# EAGLE board board comp 1 (EAGLE 6.3), part 1 of 2
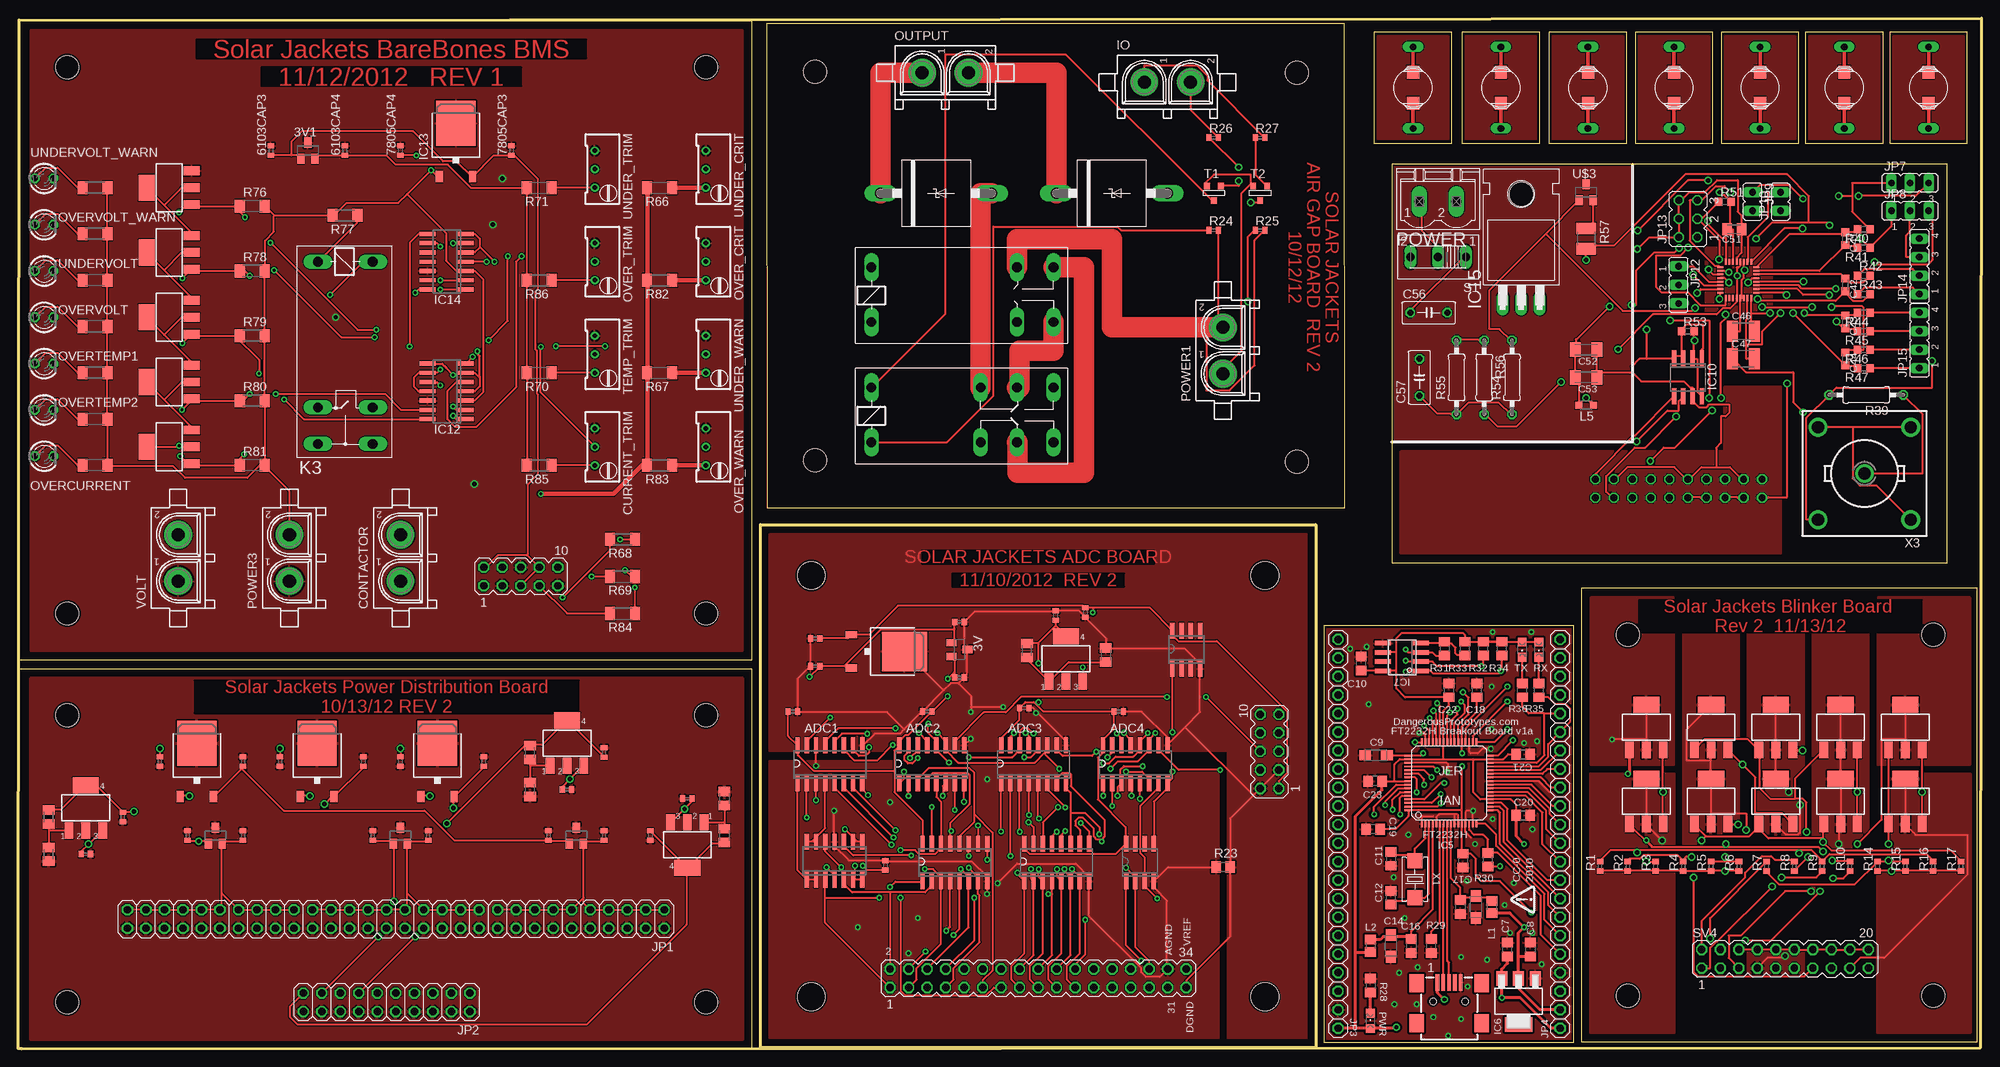
[diagram p0: board, top side]
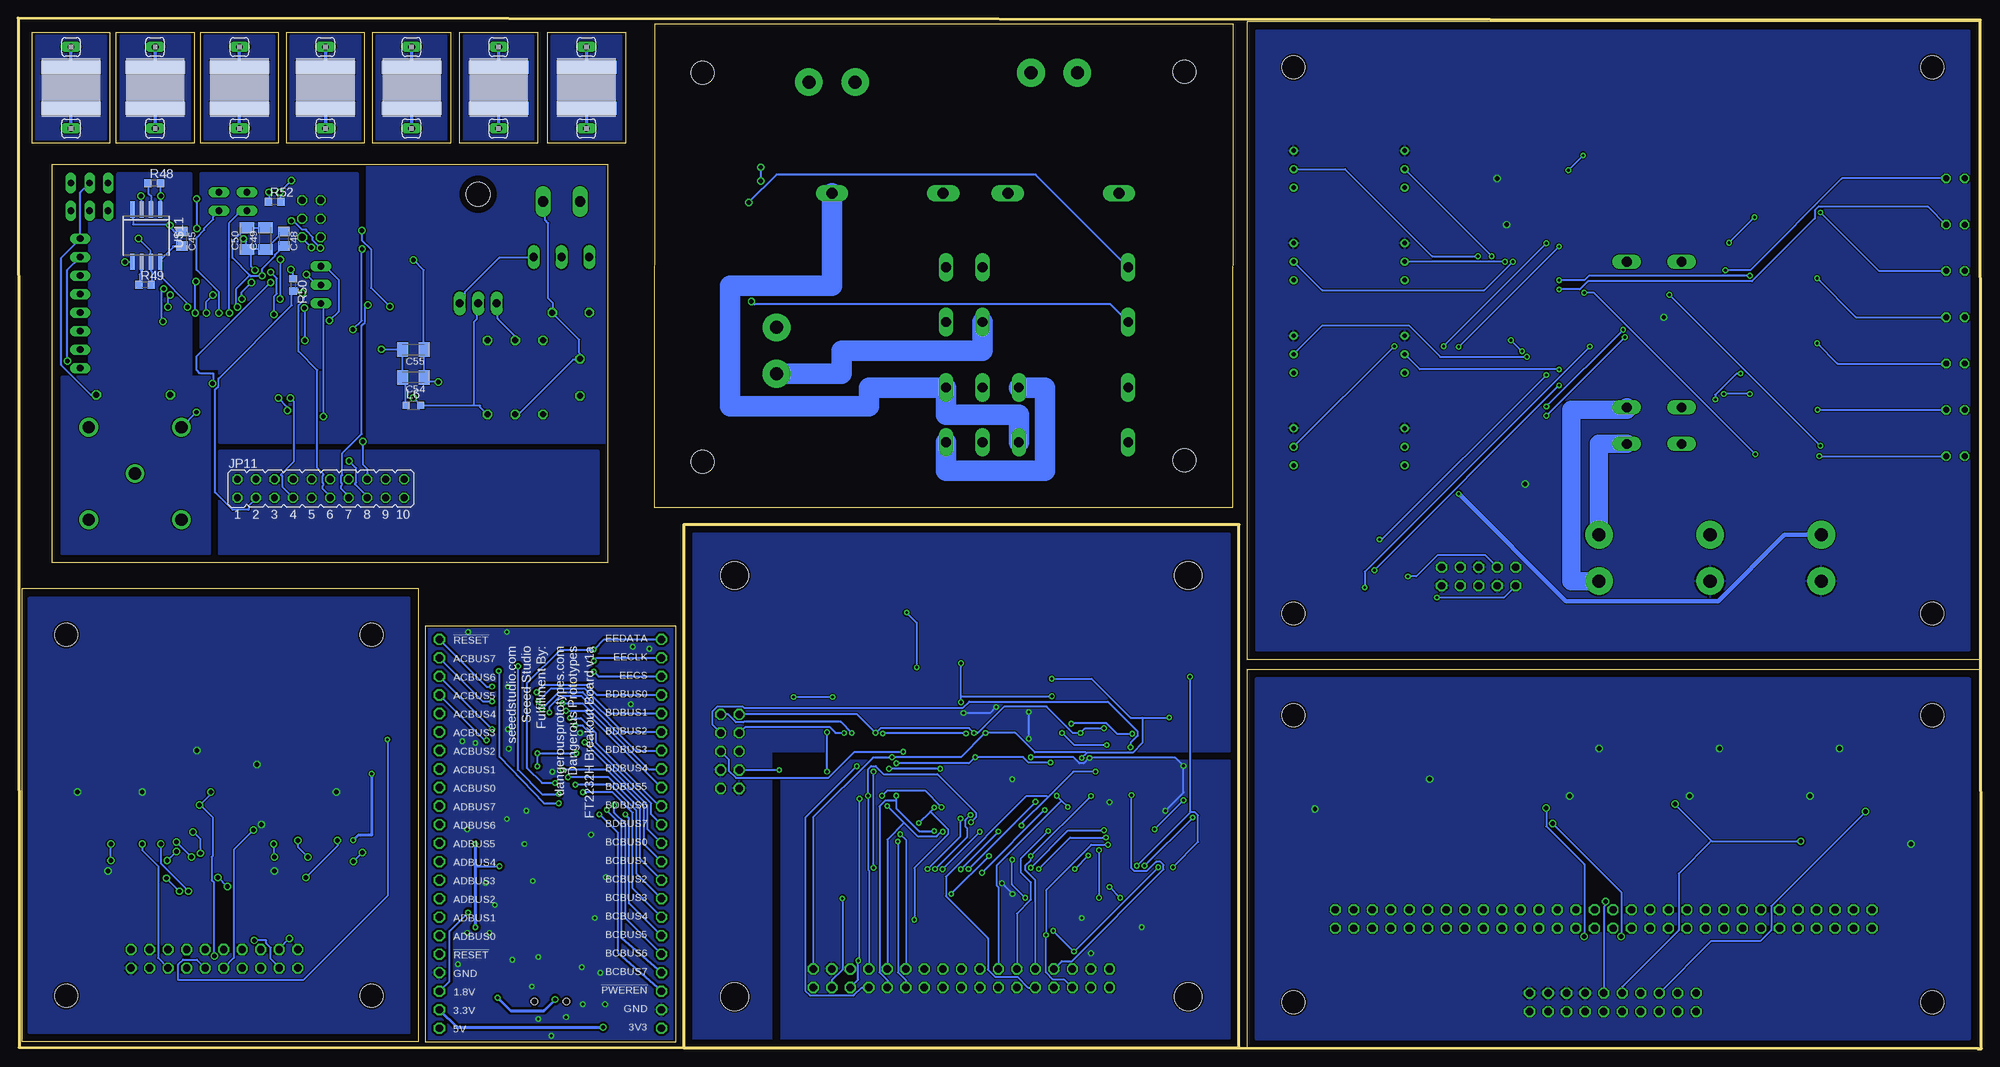
[diagram p1: board, bottom side, seen from below]

Size 269.37 x 141.35 mm. Coordinates in mm from the lower left corner, seen from the top.
Outline: 0.38,0 0.08,0 0.08,52.05 100.71,52.05 100.71,0 0.51,0
Outline: 0.51,0 0.38,0
Outline: 0.38,0 0,0 0.13,141.1 269.37,141.35 269.24,0.13 0.51,0
Outline: 100.71,53.34 100.71,140.95 0.08,140.95 0.08,53.34 100.71,53.34
Outline: 214.5,63.12 214.5,0.91 268.78,0.91 268.78,63.12 214.5,63.12
Outline: 188.47,121.28 188.47,66.67 264.67,66.67 264.67,121.28 188.47,121.28
Outline: 101.85,0.13 101.85,71.88 178.05,71.88 178.05,0.13 101.85,0.13
Outline: 102.74,74.17 182.06,74.17 182.01,140.59 102.69,140.59 102.74,74.17
Outline: 196.72,124.21 196.72,139.45 186.06,139.45 186.06,124.21 196.72,124.21
Outline: 208.79,124.21 208.79,139.45 198.12,139.45 198.12,124.21 208.79,124.21
Outline: 220.73,124.21 220.73,139.45 210.06,139.45 210.06,124.21 220.73,124.21
Outline: 232.54,124.21 232.54,139.45 221.87,139.45 221.87,124.21 232.54,124.21
Outline: 244.35,124.21 244.35,139.45 233.68,139.45 233.68,124.21 244.35,124.21
Outline: 255.91,124.21 255.91,139.45 245.24,139.45 245.24,124.21 255.91,124.21
Outline: 267.46,124.21 267.46,139.45 256.79,139.45 256.79,124.21 267.46,124.21
Outline: 213.49,0.89 213.49,58.04 179.2,58.04 179.2,0.89 213.49,0.89
Copper layers (1*16): Top 0.035mm / dielectric 1.5mm / Bottom 0.035mm
Design rules "default *": minimum track width 8mil, minimum drill 15mil, track to track 6mil, track to pad 6mil, pad to pad 6mil, via to via 6mil, smd to smd 6mil, copper to edge 10mil, drill to drill 8mil, minimum pad ring 10mil, minimum via ring 8mil, stop-mask expansion 4mil, vias tented up to drill 0mil, thermal gap 10mil
Holes 3.17 mm at 94.36,59.69 6.73,59.69 94.36,134.62 6.73,134.62 220.85,56.77 220.85,7.24 262.76,56.77 262.76,7.24 94.36,6.35 6.73,6.35 6.73,45.72 94.36,45.72 109.32,80.7 175.48,133.86 175.48,80.52 109.32,134.04
Holes 3.81 mm at 171.07,64.9 108.84,64.9 171.07,7.11 108.84,7.11

## Footprints (pad centres in the part's own frame; a part is rotated, then mirrored left to right if it is on the bottom)
SOT23 = smd 1 x 1.4: 1 -0.95,-1.1; 2 0.95,-1.1; 3 0,1.1
TO252 = smd 1 x 1.6: 1 -2.28,-4.8; 2 2.28,-4.8 | smd 5.4 x 6.2: 3 0,2.5
C0402 = smd 0.7 x 0.9: 1 -0.65,0; 2 0.65,0
SO16 = smd 0.6 x 2.2: 1 -4.445,-2.6; 2 -3.175,-2.6; 3 -1.905,-2.6; 4 -0.635,-2.6; 5 0.635,-2.6; 6 1.905,-2.6; 7 3.175,-2.6; 8 4.445,-2.6; 9 4.445,2.6; 10 3.175,2.6; 11 1.905,2.6; 12 0.635,2.6; 13 -0.635,2.6; 14 -1.905,2.6; 15 -3.175,2.6; 16 -4.445,2.6
SOT223 = smd 1.219 x 2.235: 1 -2.311,-3.099; 2 0,-3.099; 3 2.311,-3.099 | smd 3.6 x 2.2: 4 0,3.099
C805 = smd 1.3 x 1.5: 1 -0.95,0; 2 0.95,0
SMC_A = smd 1.6 x 1.4: + -1.5,0; - 1.5,0
C0603K = smd 1.05 x 1.08: 1 -0.875,0; 2 0.875,0
C0805K = smd 1.3 x 1.6: 1 -1,0; 2 1,0
C1210K = smd 1.5 x 2.9: 1 -1.5,0; 2 1.5,0
C1206K = smd 1.5 x 2: 1 -1.5,0; 2 1.5,0
C050-030X075 = drill 0.813 octagon: 1 -2.54,0; 2 2.54,0
CONN_USB_MINI-B = smd 2 x 2.5: BODY@1 -4.45,2.5; BODY@2 4.45,2.5; BODY@3 4.45,-3; BODY@4 -4.45,-3 | smd 0.5 x 2.3: D+ 0,2.6; D- -0.8,2.6; GND 1.6,2.6; ID 0.8,2.6; VUSB -1.6,2.6 | hole 0.9: -2.2,0; 2.2,0
350428-1 = drill 1.8 pad 3.81: 1 -3.175,0; 2 3.175,0
RTRIM64W = drill 0.61: 1 1.27,-2.54; 2 1.27,0; 3 1.27,2.54
P6T15 = drill 1.499 long: A 7.62,0; C -7.62,0
LQFP64 = smd 1 x 0.27: 1 -5.6,3.75; 2 -5.6,3.25; 3 -5.6,2.75; 4 -5.6,2.25; 5 -5.6,1.75; 6 -5.6,1.25; 7 -5.6,0.75; 8 -5.6,0.25; 9 -5.6,-0.25; 10 -5.6,-0.75; 11 -5.6,-1.25; 12 -5.6,-1.75; 13 -5.6,-2.25; 14 -5.6,-2.75; 15 -5.6,-3.25; 16 -5.6,-3.75; 33 5.6,-3.75; 34 5.6,-3.25; 35 5.6,-2.75; 36 5.6,-2.25; 37 5.6,-1.75; 38 5.6,-1.25; 39 5.6,-0.75; 40 5.6,-0.25; 41 5.6,0.25; 42 5.6,0.75; 43 5.6,1.25; 44 5.6,1.75; 45 5.6,2.25; 46 5.6,2.75; 47 5.6,3.25; 48 5.6,3.75 | smd 0.27 x 1: 17 -3.75,-5.6; 18 -3.25,-5.6; 19 -2.75,-5.6; 20 -2.25,-5.6; 21 -1.75,-5.6; 22 -1.25,-5.6; 23 -0.75,-5.6; 24 -0.25,-5.6; 25 0.25,-5.6; 26 0.75,-5.6; 27 1.25,-5.6; 28 1.75,-5.6; 29 2.25,-5.6; 30 2.75,-5.6; 31 3.25,-5.6; 32 3.75,-5.6; 49 3.75,5.6; 50 3.25,5.6; 51 2.75,5.6; 52 2.25,5.6; 53 1.75,5.6; 54 1.25,5.6; 55 0.75,5.6; 56 0.25,5.6; 57 -0.25,5.6; 58 -0.75,5.6; 59 -1.25,5.6; 60 -1.75,5.6; 61 -2.25,5.6; 62 -2.75,5.6; 63 -3.25,5.6; 64 -3.75,5.6
SOT223' = smd 1.5 x 2: 1 -2.3,-3.15; 2 0,-3.15; 3 2.3,-3.15 | smd 3.8 x 2: 4 0,3.15
SOIC8 = smd 0.6 x 2.2: 1 -1.905,-2.6; 2 -0.635,-2.6; 3 0.635,-2.6; 4 1.905,-2.6; 5 1.905,2.6; 6 0.635,2.6; 7 -0.635,2.6; 8 -1.905,2.6
SO-08 = smd 0.6 x 2.2: 1 -1.905,-2.6; 2 -0.635,-2.6; 3 0.635,-2.6; 4 1.905,-2.6; 5 1.905,2.6; 6 0.635,2.6; 7 -0.635,2.6; 8 -1.905,2.6
SO14 = smd 0.6 x 2.2: 1 -3.81,-2.6; 2 -2.54,-2.6; 3 -1.27,-2.6; 4 0,-2.6; 5 1.27,-2.6; 6 2.54,-2.6; 7 3.81,-2.6; 8 3.81,2.6; 9 2.54,2.6; 10 1.27,2.6; 11 0,2.6; 12 -1.27,2.6; 13 -2.54,2.6; 14 -3.81,2.6
TO220H = drill 1.118 long: 1 -2.54,-10.16; 2 0,-10.16; 3 2.54,-10.16 | hole 3.302: 0,4.826
2X30 = drill 1.016 octagon: 1 -38.1,-1.27; 2 -38.1,1.27; 3 -35.56,-1.27; 4 -35.56,1.27; 5 -33.02,-1.27; 6 -33.02,1.27; 7 -30.48,-1.27; 8 -30.48,1.27; 9 -27.94,-1.27; 10 -27.94,1.27; 11 -25.4,-1.27; 12 -25.4,1.27; 13 -22.86,-1.27; 14 -22.86,1.27; 15 -20.32,-1.27; 16 -20.32,1.27; 17 -17.78,-1.27; 18 -17.78,1.27; 19 -15.24,-1.27; 20 -15.24,1.27; 21 -12.7,-1.27; 22 -12.7,1.27; 23 -10.16,-1.27; 24 -10.16,1.27; 25 -7.62,-1.27; 26 -7.62,1.27; 27 -5.08,-1.27; 28 -5.08,1.27; 29 -2.54,-1.27; 30 -2.54,1.27; 31 0,-1.27; 32 0,1.27; 33 2.54,-1.27; 34 2.54,1.27; 35 5.08,-1.27; 36 5.08,1.27; 37 7.62,-1.27; 38 7.62,1.27; 39 10.16,-1.27; 40 10.16,1.27; 41 12.7,-1.27; 42 12.7,1.27; 43 15.24,-1.27; 44 15.24,1.27; 45 17.78,-1.27; 46 17.78,1.27; 47 20.32,-1.27; 48 20.32,1.27; 49 22.86,-1.27; 50 22.86,1.27; 51 25.4,-1.27; 52 25.4,1.27; 53 27.94,-1.27; 54 27.94,1.27; 55 30.48,-1.27; 56 30.48,1.27; 57 33.02,-1.27; 58 33.02,1.27; 59 35.56,-1.27; 60 35.56,1.27
2X10 = drill 1.016 octagon: 1 -11.43,-1.27; 2 -11.43,1.27; 3 -8.89,-1.27; 4 -8.89,1.27; 5 -6.35,-1.27; 6 -6.35,1.27; 7 -3.81,-1.27; 8 -3.81,1.27; 9 -1.27,-1.27; 10 -1.27,1.27; 11 1.27,-1.27; 12 1.27,1.27; 13 3.81,-1.27; 14 3.81,1.27; 15 6.35,-1.27; 16 6.35,1.27; 17 8.89,-1.27; 18 8.89,1.27; 19 11.43,-1.27; 20 11.43,1.27
1X22 = drill 1.016 octagon: 1 -26.67,0; 2 -24.13,0; 3 -21.59,0; 4 -19.05,0; 5 -16.51,0; 6 -13.97,0; 7 -11.43,0; 8 -8.89,0; 9 -6.35,0; 10 -3.81,0; 11 -1.27,0; 12 1.27,0; 13 3.81,0; 14 6.35,0; 15 8.89,0; 16 11.43,0; 17 13.97,0; 18 16.51,0; 19 19.05,0; 20 21.59,0; 21 24.13,0; 22 26.67,0
JP2 = drill 0.914 long: 1 -2.54,0; 2 0,0; 3 2.54,0
JP1 = drill 0.914 long: 1 0,-1.27; 2 0,1.27
JP10Q = drill 0.914 octagon: 1 -11.43,-1.27; 2 -11.43,1.27; 3 -8.89,-1.27; 4 -8.89,1.27; 5 -6.35,-1.27; 6 -6.35,1.27; 7 -3.81,-1.27; 8 -3.81,1.27; 9 -1.27,-1.27; 10 -1.27,1.27; 11 1.27,-1.27; 12 1.27,1.27; 13 3.81,-1.27; 14 3.81,1.27; 15 6.35,-1.27; 16 6.35,1.27; 17 8.89,-1.27; 18 8.89,1.27; 19 11.43,-1.27; 20 11.43,1.27
JP3Q = drill 0.914 octagon: 1 -2.54,-1.27; 2 -2.54,1.27; 3 0,-1.27; 4 0,1.27; 5 2.54,-1.27; 6 2.54,1.27
JP4 = drill 0.914 long: 1 -3.81,0; 2 -1.27,0; 3 1.27,0; 4 3.81,0
G2R2 = drill 1.321 long: 1 -2.54,-3.683; 2 -2.54,3.81; O1 12.471,3.81; O2 12.471,-3.683; P1 17.45,3.81; P2 17.45,-3.683; S1 22.454,3.81; S2 22.454,-3.683
G2R2A = drill 1.321 long: 1 -2.54,-3.683; 2 -2.54,3.81; P1 17.45,3.81; P2 17.45,-3.683; S1 22.454,3.81; S2 22.454,-3.683
G2REA = drill 1.321 long: 1 -2.54,-3.683; 2 -2.54,3.81; P 17.45,-3.683; P@ 17.45,3.81; S 22.454,-3.683; S@ 22.454,3.81
FB805 = smd 1.3 x 1.5: 1 -0.85,0; 2 0.85,0
L2012C = smd 1 x 1: 1 -1,0; 2 1,0
LQH55PN220MR0L = smd 1.8 x 1.7: P$1 -2.135,0; P$2 2.135,0
NRS8040T0R9NJGJ = smd 8.2 x 1.8: P$1 0,2.8; P$2 0,-2.8
LED3MM = drill 0.813 octagon: A -1.27,0; K 1.27,0
MSTBV2 = drill 1.397 long: 1 -2.54,0; 2 2.54,0
LED-805 = smd 1.2 x 1.2: A 0,-1.05; C 0,1.05
R0402 = smd 0.7 x 0.9: 1 -0.65,0; 2 0.65,0
M0805 = smd 1.3 x 1.6: 1 -0.95,0; 2 0.95,0
R805 = smd 1.3 x 1.5: 1 -0.95,0; 2 0.95,0
0207/10 = drill 0.813 octagon: 1 -5.08,0; 2 5.08,0
R0603 = smd 1 x 1.1: 1 -0.85,0; 2 0.85,0
R3225 = smd 1.6 x 2.7: 1 -1.4,0; 2 1.4,0
M1406 = smd 1.4 x 1.8: 1 -1.7,0; 2 1.7,0
255SB = drill 1.118 long: 1 -3.81,0; 2 0,0; 3 3.81,0
MA17-2 = drill 1.016 octagon: 1 -20.32,-1.27; 2 -20.32,1.27; 3 -17.78,-1.27; 4 -17.78,1.27; 5 -15.24,-1.27; 6 -15.24,1.27; 7 -12.7,-1.27; 8 -12.7,1.27; 9 -10.16,-1.27; 10 -10.16,1.27; 11 -7.62,-1.27; 12 -7.62,1.27; 13 -5.08,-1.27; 14 -5.08,1.27; 15 -2.54,-1.27; 16 -2.54,1.27; 17 0,-1.27; 18 0,1.27; 19 2.54,-1.27; 20 2.54,1.27; 21 5.08,-1.27; 22 5.08,1.27; 23 7.62,-1.27; 24 7.62,1.27; 25 10.16,-1.27; 26 10.16,1.27; 27 12.7,-1.27; 28 12.7,1.27; 29 15.24,-1.27; 30 15.24,1.27; 31 17.78,-1.27; 32 17.78,1.27; 33 20.32,-1.27; 34 20.32,1.27
MA05-2 = drill 1.016 octagon: 1 -5.08,-1.27; 2 -5.08,1.27; 3 -2.54,-1.27; 4 -2.54,1.27; 5 0,-1.27; 6 0,1.27; 7 2.54,-1.27; 8 2.54,1.27; 9 5.08,-1.27; 10 5.08,1.27
MA10-2 = drill 1.016 octagon: 1 -11.43,-1.27; 2 -11.43,1.27; 3 -8.89,-1.27; 4 -8.89,1.27; 5 -6.35,-1.27; 6 -6.35,1.27; 7 -3.81,-1.27; 8 -3.81,1.27; 9 -1.27,-1.27; 10 -1.27,1.27; 11 1.27,-1.27; 12 1.27,1.27; 13 3.81,-1.27; 14 3.81,1.27; 15 6.35,-1.27; 16 6.35,1.27; 17 8.89,-1.27; 18 8.89,1.27; 19 11.43,-1.27; 20 11.43,1.27
SOT-23 = smd 0.787 x 0.889: 1 0.025,-1.016; 2 -0.94,1.016; 3 0.991,1.016
ADS8363 = smd 0.28 x 0.85: P$1_ 0.725,0.725; P$2_ 1.225,0.725; P$3_ 1.725,0.725; P$4_ 2.225,0.725; P$5_ 2.725,0.725; P$6_ 3.225,0.725; P$7_ 3.725,0.725; P$8_ 4.225,0.725; P$17_ 4.225,-4.225; P$18_ 3.725,-4.225; P$19_ 3.225,-4.225; P$20_ 2.725,-4.225; P$21_ 2.225,-4.225; P$22_ 1.725,-4.225; P$23_ 1.225,-4.225; P$24_ 0.725,-4.225 | smd 0.85 x 0.28: P$9_ 4.95,0; P$10_ 4.95,-0.5; P$11_ 4.95,-1; P$12_ 4.95,-1.5; P$13_ 4.95,-2; P$14_ 4.95,-2.5; P$15_ 4.95,-3; P$16_ 4.95,-3.5; P$25_ 0,-3.5; P$26_ 0,-3; P$27_ 0,-2.5; P$28_ 0,-2; P$29_ 0,-1.5; P$30_ 0,-1; P$31_ 0,-0.5; P$32_ 0,0
SINGLE_HEADER = drill 0.914 long: P$1 0,0
SOP-08 = smd 0.6 x 2.2: 1 -1.905,-3.6; 2 -0.635,-3.6; 3 0.635,-3.6; 4 1.905,-3.6; 5 1.905,3.575; 6 0.635,3.575; 7 -0.635,3.575; 8 -1.905,3.575
4X6 = smd 2.032 x 2.032: 1 -2.54,0; 2 2.54,0
B35N57 = drill 1.7: 1 0,0; 2 6.35,6.35; 3 -6.35,6.35; 4 -6.35,-6.35; 5 6.35,-6.35

## Placement (x,y rotation side)
3V  MAX6103  [SOT23]  129.16,54.74 270 top
3V1  MAX6103  [SOT23]  39.75,123.19 0 top
3V2  MAX6103  [SOT23]  76.58,29.21 0 top
3V3  MAX6103  [SOT23]  52.45,29.21 0 top
3V4  MAX6103  [SOT23]  27.05,29.21 0 top
5V  LM7805TV  [TO252]  119.13,54.48 270 top
317CAP1  .33uF  [C0402]  146.43,59.82 270 top
317CAP2  1uF  [C0402]  142.37,59.44 90 top
317CAP3  .33uF  [C0402]  9.27,26.67 0 top
317CAP4  1uF  [C0402]  14.35,31.75 270 top
317CAP5  .33uF  [C0402]  75.31,35.56 0 top
317CAP6  1uF  [C0402]  80.39,40.64 90 top
317CAP7  .33uF  [C0402]  91.82,34.29 180 top
317CAP8  1uF  [C0402]  86.74,29.21 270 top
6103CAP1  1uF  [C0402]  129.16,58.55 0 top
6103CAP2  1uF  [C0402]  129.16,50.93 0 top
6103CAP3  1uF  [C0402]  34.67,123.19 90 top
6103CAP4  1uF  [C0402]  44.83,123.19 90 top
6103CAP5  1uF  [C0402]  72.77,29.21 90 top
6103CAP6  1uF  [C0402]  80.39,29.21 90 top
6103CAP7  1uF  [C0402]  48.64,29.21 90 top
6103CAP8  1uF  [C0402]  56.26,29.21 90 top
6103CAP9  1uF  [C0402]  23.24,29.21 90 top
6103CAP10  1uF  [C0402]  30.86,29.21 90 top
6484CAP1  .1uF  [C0402]  119,25.15 90 top
7805CAP1  .33uF  [C0402]  109.35,56.26 180 top
7805CAP2  1uF  [C0402]  109.35,52.45 180 top
7805CAP3  1uF  [C0402]  67.69,123.19 90 top
7805CAP4  1uF  [C0402]  52.45,123.19 90 top
ADC1  MCP-3008  [SO16]  111.38,38.99 0 top
ADC2  MCP-3008  [SO16]  125.35,38.99 0 top
ADC3  MCP-3008  [SO16]  139.32,38.99 0 top
ADC4  MCP-3008  [SO16]  153.29,38.99 0 top
ADC_CAP1  .1uF  [C0402]  106.3,46.23 0 top
ADC_CAP2  .1uF  [C0402]  124.71,46.23 180 top
ADC_CAP3  .1uF  [C0402]  138.05,46.74 0 top
ADC_CAP4  .1uF  [C0402]  151,46.23 0 top
BLINKER-L1  N-HEXFET-2D_SOT232-  [SOT223]  223.39,44.07 0 top
BLINKER-L2  N-HEXFET-2D_SOT232-  [SOT223]  223.39,33.91 0 top
BLINKER-R1  N-HEXFET-2D_SOT232-  [SOT223]  258.95,44.07 0 top
BLINKER-R2  N-HEXFET-2D_SOT232-  [SOT223]  258.95,33.91 0 top
BRAKE-C1  N-HEXFET-2D_SOT232-  [SOT223]  241.17,44.07 0 top
BRAKE-C2  N-HEXFET-2D_SOT232-  [SOT223]  241.17,33.91 0 top
BRAKE-L1  N-HEXFET-2D_SOT232-  [SOT223]  232.28,44.07 0 top
BRAKE-L2  N-HEXFET-2D_SOT232-  [SOT223]  232.28,33.91 0 top
BRAKE-R1  N-HEXFET-2D_SOT232-  [SOT223]  250.06,44.07 0 top
BRAKE-R2  N-HEXFET-2D_SOT232-  [SOT223]  250.06,33.91 0 top
C1  1uF  [C0402]  19.43,39.37 270 top
C2  1uF  [C0402]  30.86,39.37 90 top
C3  1uF  [C0402]  35.94,39.37 270 top
C4  1uF  [C0402]  47.37,39.37 90 top
C5  1uF  [C0402]  52.45,39.37 270 top
C6  1uF  [C0402]  63.88,39.37 90 top
C7  0.1uF  [C805]  204.34,13.59 90 top
C8  0.1uF  [C805]  207.52,13.59 90 top
C9  3.3uF  [SMC_A]  186.31,40.26 180 top
C10  0.1uF  [C805]  184.28,52.83 90 top
C11  27pF  [C805]  188.34,26.04 270 top
C12  27pF  [C805]  188.34,20.7 90 top
C13  4.7uF  [SMC_A]  200.03,19.43 270 top
C14  4.7uF  [SMC_A]  188.34,14.1 270 top
C15  0.1uF  [C805]  197.87,19.43 270 top
C16  0.1uF  [C805]  191.13,14.1 270 top
C17  0.1uF  [C805]  198.25,25.78 270 top
C18  0.1uF  [C805]  200.15,49.15 90 top
C19  0.1uF  [C805]  185.93,30.1 180 top
C20  0.1uF  [C805]  206.5,32 0 top
C21  0.1uF  [C805]  206.5,40.39 0 top
C22  0.1uF  [C805]  196.34,49.15 90 top
C23  0.1uF  [C805]  186.18,36.7 180 top
C41  3900pF  [C0603K]  250.7,111.12 270 top
C42  3900pF  [C0603K]  250.7,104.78 270 top
C43  3900pF  [C0603K]  250.7,99.69 270 top
C44  3900pF  [C0603K]  250.7,94.61 270 top
C45  1uF  [C0805K]  246.89,111.12 270 bottom
C46  10uF  [C1210K]  236.73,98.42 0 top
C47  10uF  [C1210K]  236.73,94.61 0 top
C48  1uF  [C0805K]  232.92,111.12 270 bottom
C49  0.1uF  [C1206K]  235.46,111.12 90 bottom
C50  0.1uF  [C1206K]  238,111.12 90 bottom
C51  1uF  [C0805K]  235.46,112.39 180 top
C52  0.1uF  [C1206K]  215.14,95.89 180 top
C53  0.1uF  [C1206K]  215.14,92.08 180 top
C54  0.1uF  [C1206K]  215.14,92.08 180 bottom
C55  0.1uF  [C1206K]  215.14,95.89 180 bottom
C56  [C050-030X075]  193.55,100.97 0 top
C57  [C050-030X075]  192.28,92.08 90 top
CONN1  CONN_USB  [CONN_USB_MINI-B]  196.34,6.48 0 top
CONTACTOR  350428-1  [350428-1]  52.45,67.31 90 top
CURRENT_TRIM  1k  [RTRIM64W]  80.39,82.55 180 top
D1  5KPXX  [P6T15]  125.95,117.35 0 top
D2  5KPXX  [P6T15]  150.08,117.35 0 top
IC1  LM317  [SOT223]  75.31,41.91 0 top
IC2  LM317  [SOT223]  9.27,33.02 0 top
IC3  LM317  [SOT223]  91.82,27.94 180 top
IC4  LM317  [SOT223]  143.76,53.47 0 top
IC5  FT2232H  [LQFP64]  196.34,36.45 90 top
IC6  [SOT223']  205.87,6.48 180 top
IC7  93C46  [SOIC8]  189.87,53.72 90 top
IC10  24LC256T  [SO-08]  229.11,92.08 180 top
IC12  LM339D  [SO14]  58.8,90.17 90 top
IC13  7805DT  [TO252]  60.07,124.46 0 top
IC14  LM339D  [SO14]  58.8,107.95 90 top
IC15  317T  [TO220H]  206.25,112.39 0 top
IO  350428-1  [350428-1]  157.7,132.59 0 top
JP1  [2X30]  50.55,17.78 180 top
JP2  [2X10]  50.55,6.35 180 top
JP3  [1X22]  181.1,29.46 90 top
JP4  [1X22]  211.58,29.46 90 top
JP7  [JP2]  259.59,118.75 0 top
JP8  [JP2]  259.59,114.94 0 top
JP9  [JP1]  238,116.2 180 top
JP10  [JP1]  241.81,116.2 0 top
JP11  [JP10Q]  227.84,76.83 0 bottom
JP12  [JP2]  227.84,104.78 270 top
JP13  [JP3Q]  229.13,113.84 90 top
JP14  [JP4]  260.86,107.31 90 top
JP15  [JP4]  260.86,97.16 90 top
K1  G2R2  [G2R2]  119.6,86.87 0 top
K2  G2R2A  [G2R2A]  119.6,103.38 0 top
K3  G2REA  [G2REA]  44.83,105.41 270 top
L1  [FB805]  202.18,19.43 270 top
L2  [FB805]  185.55,14.1 270 top
L5  [L2012C]  215.14,88.27 180 top
L6  [L2012C]  215.14,88.27 0 bottom
LMC6484_1  LMC6484  [SO14]  112.01,25.78 0 top
NEWBATT  LQH55PN220MR0L  [LQH55PN220MR0L]  191.39,131.83 270 top
NEWBATT1  LQH55PN220MR0L  [LQH55PN220MR0L]  203.45,131.83 270 top
NEWBATT2  LQH55PN220MR0L  [LQH55PN220MR0L]  215.39,131.83 270 top
NEWBATT3  LQH55PN220MR0L  [LQH55PN220MR0L]  227.2,131.83 270 top
NEWBATT4  LQH55PN220MR0L  [LQH55PN220MR0L]  239.01,131.83 270 top
NEWBATT5  LQH55PN220MR0L  [LQH55PN220MR0L]  250.57,131.83 270 top
NEWBATT6  LQH55PN220MR0L  [LQH55PN220MR0L]  262.13,131.83 270 top
OLDBATT  NRS8040T0R9NJGJ  [NRS8040T0R9NJGJ]  191.39,131.83 0 bottom
OLDBATT1  NRS8040T0R9NJGJ  [NRS8040T0R9NJGJ]  203.45,131.83 0 bottom
OLDBATT2  NRS8040T0R9NJGJ  [NRS8040T0R9NJGJ]  215.39,131.83 0 bottom
OLDBATT3  NRS8040T0R9NJGJ  [NRS8040T0R9NJGJ]  227.2,131.83 0 bottom
OLDBATT4  NRS8040T0R9NJGJ  [NRS8040T0R9NJGJ]  239.01,131.83 0 bottom
OLDBATT5  NRS8040T0R9NJGJ  [NRS8040T0R9NJGJ]  250.57,131.83 0 bottom
OLDBATT6  NRS8040T0R9NJGJ  [NRS8040T0R9NJGJ]  262.13,131.83 0 bottom
OUTPUT  350428-1  [350428-1]  127.22,133.86 0 top
OVER_CRIT  10k  [RTRIM64W]  95.63,107.95 180 top
OVER_TRIM  1k  [RTRIM64W]  80.39,107.95 180 top
OVER_WARN  10K  [RTRIM64W]  95.63,82.55 180 top
OVERCURRENT  TLLG4400  [LED3MM]  3.56,81.28 0 top
OVERCURRENT_FET  N-HEXFET-2D_SOT232-  [SOT223]  20.7,82.55 90 top
OVERTEMP1  TLLG4400  [LED3MM]  3.56,93.98 0 top
OVERTEMP1_FET  N-HEXFET-2D_SOT232-  [SOT223]  20.7,100.33 90 top
OVERTEMP2  TLLG4400  [LED3MM]  3.56,87.63 0 top
OVERTEMP2_FET  N-HEXFET-2D_SOT232-  [SOT223]  20.7,91.44 90 top
OVERVOLT  TLLG4400  [LED3MM]  3.56,100.33 0 top
OVERVOLT_FET  N-HEXFET-2D_SOT232-  [SOT223]  20.7,109.22 90 top
OVERVOLT_WARN  TLLG4400  [LED3MM]  3.56,113.03 0 top
POWER  MSTBV2  [MSTBV2]  194.82,116.2 0 top
POWER1  350428-1  [350428-1]  165.32,95.76 90 top
POWER3  350428-1  [350428-1]  37.21,67.31 90 top
PWR  [LED-805]  185.55,3.81 0 top
PWR_1  7805DT  [TO252]  24.51,39.37 0 top
PWR_2  7805DT  [TO252]  41.02,39.37 0 top
PWR_3  7805DT  [TO252]  57.53,39.37 0 top
R1  1k  [R0402]  217.04,25.02 90 top
R2  1k  [R0402]  220.85,25.02 90 top
R3  1k  [R0402]  224.66,25.02 90 top
R4  1k  [R0402]  228.47,25.02 90 top
R5  1k  [R0402]  232.28,25.02 90 top
R6  1k  [R0402]  236.09,25.02 90 top
R7  1K  [R0402]  239.9,25.02 90 top
R8  1K  [R0402]  243.71,25.02 90 top
R9  1K  [R0402]  247.52,25.02 90 top
R10  1K  [R0402]  251.33,25.02 90 top
R11  220  [M0805]  4.19,31.75 270 top
R12  361  [M0805]  4.19,26.67 270 top
R13  220  [M0805]  70.23,40.64 270 top
R14  1k  [R0402]  255.14,25.02 90 top
R15  1k  [R0402]  258.95,25.02 90 top
R16  1k  [R0402]  262.76,25.02 90 top
R17  1k  [R0402]  266.57,25.02 90 top
R18  361  [M0805]  70.23,35.56 270 top
R19  220  [M0805]  96.9,29.21 90 top
R20  361  [M0805]  96.9,34.29 90 top
R21  220  [M0805]  138.43,54.61 270 top
R22  361  [M0805]  149.22,53.98 90 top
R23  0  [M0805]  165.35,24.89 0 top
R24  1k  [R0402]  164.05,112.27 0 top
R25  1k  [R0402]  170.4,112.27 0 top
R26  1k  [R0402]  164.05,124.97 0 top
R27  1k  [R0402]  170.4,124.97 0 top
R28  470  [R805]  185.55,8.64 270 top
R29  12k 1%  [R805]  193.93,14.1 90 top
R30  10k  [R805]  201.68,25.91 90 top
R31  2.2k  [R805]  195.71,54.86 270 top
R32  10k  [R805]  201.04,54.86 90 top
R33  10k  [R805]  198.5,54.86 90 top
R34  10k  [R805]  203.58,54.86 90 top
R35  470  [R805]  208.66,49.15 90 top
R36  470  [R805]  206.38,49.15 90 top
R39  1M  [0207/10]  253.57,89.69 180 top
R40  49.9  [R0603]  253.24,112.39 180 top
R41  49.9  [R0603]  253.24,109.86 180 top
R42  49.9  [R0603]  253.24,106.05 0 top
R43  49.9  [R0603]  253.24,103.5 0 top
R44  49.9  [R0603]  253.24,100.97 180 top
R45  49.9  [R0603]  253.24,98.42 180 top
R46  49.9  [R0603]  253.24,95.89 180 top
R47  49.9  [R0603]  253.24,93.34 180 top
R48  49.9  [R0603]  250.7,118.75 0 bottom
R49  49.9  [R0603]  251.97,104.78 0 bottom
R50  33  [R0603]  231.65,104.78 270 bottom
R51  10K  [R0603]  234.19,116.2 0 top
R52  10K  [R0603]  234.19,116.2 0 bottom
R53  33  [R0603]  229.11,98.42 0 top
R54  150  [0207/10]  204.98,92.08 90 top
R55  240  [0207/10]  197.36,92.08 90 top
R56  725  [0207/10]  201.17,92.08 270 top
R57  0  [R3225]  215.14,111.12 270 top
R66  100k  [M1406]  88.01,118.11 180 top
R67  100k  [M1406]  88.01,92.71 180 top
R68  100  [M1406]  82.93,69.85 180 top
R69  100  [M1406]  82.93,64.77 180 top
R70  100  [M1406]  71.5,92.71 180 top
R71  100  [M1406]  71.5,118.11 180 top
R72  1k  [M1406]  10.54,105.41 0 top
R73  1k  [M1406]  10.54,118.11 0 top
R74  1k  [M1406]  10.54,92.71 0 top
R75  1k  [M1406]  10.54,86.36 0 top
R76  1k  [M1406]  32.13,115.57 0 top
R77  100  [M1406]  44.83,114.3 180 top
R78  1k  [M1406]  32.13,106.68 0 top
R79  1k  [M1406]  32.13,97.79 0 top
R80  1k  [M1406]  32.13,88.9 0 top
R81  1k  [M1406]  32.13,80.01 0 top
R82  100k  [M1406]  88.01,105.41 180 top
R83  100k  [M1406]  88.01,80.01 180 top
R84  1k  [M1406]  82.93,59.69 180 top
R85  100  [M1406]  71.5,80.01 180 top
R86  100  [M1406]  71.5,105.41 180 top
R87  1k  [M1406]  10.54,99.06 0 top
R88  1k  [M1406]  10.54,111.76 0 top
R89  1k  [M1406]  10.54,80.01 0 top
RX  [LED-805]  208.66,54.74 180 top
S1  [255SB]  194.82,108.58 180 top
SV1  [MA17-2]  139.95,9.65 0 top
SV2  [MA05-2]  171.7,40.77 90 top
SV3  [MA05-2]  68.96,64.77 0 top
SV4  [MA10-2]  242.44,12.32 0 top
T1  [SOT-23]  164.05,117.35 0 top
T2  [SOT-23]  170.4,117.35 0 top
TEMP_TRIM  1k  [RTRIM64W]  80.39,95.25 180 top
TX  [LED-805]  206.38,54.74 180 top
U$1  LM35  [SO-08]  160.27,54.74 0 top
U$2  ADS8386  [ADS8363]  237.79,107.93 270 top
U$3  LM4040  [SOT23]  215.14,117.47 0 top
U$4  [DP_LOGO]  207.52,20.45 90 top
U$5  SINGLE_HEADER  [SINGLE_HEADER]  191.39,126.24 0 bottom
U$6  SP720APP  [SO16]  128.52,25.53 0 top
U$7  SP720APP  [SO16]  142.49,25.53 0 top
U$8  SP721APP  [SO-08]  153.92,25.53 0 top
U$9  SINGLE_HEADER  [SINGLE_HEADER]  191.39,137.41 180 bottom
U$10  SINGLE_HEADER  [SINGLE_HEADER]  203.45,126.24 0 bottom
U$11  OPA2365  [SOP-08]  251.79,111.51 180 bottom
U$12  SINGLE_HEADER  [SINGLE_HEADER]  203.45,137.41 180 bottom
U$13  SINGLE_HEADER  [SINGLE_HEADER]  215.39,126.24 0 bottom
U$14  SINGLE_HEADER  [SINGLE_HEADER]  215.39,137.41 180 bottom
U$15  SINGLE_HEADER  [SINGLE_HEADER]  227.2,126.24 0 bottom
U$16  SINGLE_HEADER  [SINGLE_HEADER]  227.2,137.41 180 bottom
U$17  SINGLE_HEADER  [SINGLE_HEADER]  239.01,126.24 0 bottom
U$18  SINGLE_HEADER  [SINGLE_HEADER]  239.01,137.41 180 bottom
U$19  SINGLE_HEADER  [SINGLE_HEADER]  250.57,126.24 0 bottom
U$20  SINGLE_HEADER  [SINGLE_HEADER]  250.57,137.41 180 bottom
U$21  SINGLE_HEADER  [SINGLE_HEADER]  262.13,126.24 0 bottom
U$22  SINGLE_HEADER  [SINGLE_HEADER]  262.13,137.41 180 bottom
UNDER_CRIT  10k  [RTRIM64W]  95.63,120.65 180 top
UNDER_TRIM  1k  [RTRIM64W]  80.39,120.65 180 top
UNDER_WARN  10K  [RTRIM64W]  95.63,95.25 180 top
UNDERVOLT  TLLG4400  [LED3MM]  3.56,106.68 0 top
UNDERVOLT_FET  N-HEXFET-2D_SOT232-  [SOT223]  20.7,118.11 90 top
UNDERVOLT_WARN  TLLG4400  [LED3MM]  3.56,119.38 0 top
VOLT  350428-1  [350428-1]  21.97,67.31 90 top
X1  12MHz  [4X6]  191.64,23.24 270 top
X3  B35N57  [B35N57]  253.34,78.89 180 top

## Library data of the parts
3V 3V1-3V4 ADC1-ADC4 LMC6484_1 U$1 U$6-U$8 = SolarJacketsADC
5V IC1-IC4 IC12-IC15 PWR_1-PWR_3 = linear
317CAP1-317CAP8 6103CAP1-6103CAP10 6484CAP1 7805CAP1-7805CAP4 ADC_CAP1-ADC_CAP4 C1-C6 C41-C55 CURRENT_TRIM OVER_CRIT OVER_TRIM OVER_WARN R1-R27 R40-R57 R66-R89 TEMP_TRIM UNDER_CRIT UNDER_TRIM UNDER_WARN = rcl
BLINKER-L1 BLINKER-L2 BLINKER-R1 BLINKER-R2 BRAKE-C1 BRAKE-C2 BRAKE-L1 BRAKE-L2 BRAKE-R1 BRAKE-R2 OVERCURRENT_FET OVERTEMP1_FET OVERTEMP2_FET OVERVOLT_FET UNDERVOLT_FET = transistor-power
C7-C23 CONN1 IC6 L1 L2 PWR R28-R36 RX TX U$4 X1 = dp_devices
C56 C57 L5 L6 R39 = resistor
CONTACTOR IO OUTPUT POWER1 POWER3 VOLT = con-amp
D1 D2 = diode
IC5 = DP-EagleLibrary
IC7 = dp_devices; 93C46: 93C46
IC10 = microchip; MF: MICROCHIP; MPN: 24LC128-I/SNG; OC_FARNELL: 9757937; OC_NEWARK: 30H1511
JP1 JP2 = pinhead
JP3 JP4 = pinhead - Copy
JP7-JP15 = jumper
K1 = relay; MF: OMRON COMPONENTS USA; MPN: G2R-2-DC6; OC_FARNELL: unknown; OC_NEWARK: 89C5317
K2 = relay; MPN: G2R-2A-DC24; OC_FARNELL: 6985269; OC_NEWARK: 36M5257
K3 = relay; OC_FARNELL: unknown; OC_NEWARK: unknown
NEWBATT NEWBATT1-NEWBATT6 OLDBATT OLDBATT1-OLDBATT6 U$3 U$5 U$9 U$10 U$12-U$22 = SolarJackets_BMS
OVERCURRENT OVERTEMP1 OVERTEMP2 OVERVOLT OVERVOLT_WARN UNDERVOLT UNDERVOLT_WARN = led; MF: VISHAY SEMICONDUCTOR; OC_FARNELL: 1612435
POWER = con-phoenix-508; MPN: MSTBV 2,5/2-GF-5.08; OC_FARNELL: 1792792; OC_NEWARK: 69R9845
S1 = switch
SV1-SV4 = con-lstb; OC_FARNELL: unknown; OC_NEWARK: unknown
T1 T2 = zetex; OC_FARNELL: unknown; OC_NEWARK: unknown
U$2 U$11 = ADC_Research
X3 = con-coax; OC_FARNELL: unknown; OC_NEWARK: unknown

## Nets
1.8V: C9.+ C17.1 C18.1 C19.1 IC5.12 IC5.37 IC5.49 IC5.64 JP4.3
3.3V: 317CAP2.1 ADC1.16 ADC2.16 ADC3.16 ADC4.16 ADC_CAP1.1 ADC_CAP2.1 ADC_CAP3.1 ADC_CAP4.1 IC4.4 R21.1 U$6.16 U$7.16 U$8.8
3.3V1: 317CAP8.1 IC3.4 JP2.19 R19.1
3.3V2: 317CAP4.1 IC2.4 JP2.15 R11.1
3.3V3: C8.1 C10.1 C20.1 C21.1 C22.1 C23.1 IC5.20 IC5.31 IC5.42 IC5.50 IC5.56 IC6.2 IC7.6 IC7.8 JP3.1 JP4.2 L1.2 L2.2 PWR.A R30.1 R32.2 R33.2 R34.2 RX.A TX.A
3.3V4: 317CAP6.1 IC1.4 JP2.17 R13.1
3.3V+: IC10.2 IC10.8 R53.2 R54.2 U$3.1
5V: 3V2.1 6103CAP5.1 C2.1 PWR_1.2
5V1: C6.1 JP2.13 PWR_3.2
5V2: 3V.1 5V.2 6103CAP1.1 6484CAP1.1 7805CAP2.1 LMC6484_1.4
5V3: 3V1.1 6103CAP3.1 7805CAP3.1 IC13.2 SV3.2 SV3.5 SV3.8
5V4: 3V3.1 6103CAP7.1 JP2.9
5V5: 3V4.1 6103CAP9.1 C4.1 JP2.11 PWR_2.2
5V6: C7.1 CONN1.VUSB IC6.3 JP4.1
5V+: C45.2 C48.2 C49.2 C50.2 C54.2 C55.2 L6.1 U$2.P$13_ U$2.P$29_ U$11.8
12V: 5V.1 317CAP1.1 7805CAP1.1 IC4.3 SV2.1 U$1.8
12V1: K2.P1 POWER1.2 R24.2 R25.2
12V2: 7805CAP4.1 IC12.3 IC13.1 IC14.3 POWER3.2 R72.2 R73.2 R74.2 R75.2 R76.2 R77.2 R78.2 R79.2 R80.2 R81.2 R87.2 R88.2 R89.2
12V3: SV4.6 SV4.8 SV4.10 SV4.12 SV4.14 SV4.16 SV4.18 SV4.20
12V4: 317CAP3.1 317CAP5.1 317CAP7.1 C1.1 C3.1 C5.1 IC1.3 IC2.3 IC3.3 JP2.1 JP2.3 JP2.5 JP2.7 PWR_1.1 PWR_2.1 PWR_3.1
96V: R66.2 R67.2 R82.2 R83.2 VOLT.2
!PWEREN: IC5.60 JP3.3
!RESET: IC5.14 JP4.5 R30.2
!SUSPEND: IC5.36 JP4.22
A1: ADC1.1 LMC6484_1.1 LMC6484_1.2
A2: ADC1.2 LMC6484_1.6 LMC6484_1.7
A3: ADC1.3 LMC6484_1.8 LMC6484_1.9
A4: ADC1.4 LMC6484_1.13 LMC6484_1.14
AC0: IC5.26 JP4.14
AC1: IC5.27 JP4.15
AC2: IC5.28 JP4.16
AC3: IC5.29 JP4.17 R35.1
AC4: IC5.30 JP4.18 R36.1
AC5: IC5.32 JP4.19
AC6: IC5.33 JP4.20
AC7: IC5.34 JP4.21
AD0: IC5.16 JP4.6
AD1: IC5.17 JP4.7
AD2: IC5.18 JP4.8
AD3: IC5.19 JP4.9
AD4: IC5.21 JP4.10
AD5: IC5.22 JP4.11
AD6: IC5.23 JP4.12
AD7: IC5.24 JP4.13
AGND: 6484CAP1.2 ADC1.14 ADC2.14 ADC3.14 ADC4.14 LMC6484_1.11 R23.1 SV1.32 U$6.8 U$7.8 U$8.4
BC0: IC5.48 JP3.11
BC1: IC5.52 JP3.10
BC2: IC5.53 JP3.9
BC3: IC5.54 JP3.8
BC4: IC5.55 JP3.7
BC5: IC5.57 JP3.6
BC6: IC5.58 JP3.5
BC7: IC5.59 JP3.4
BD0: IC5.38 JP3.19
BD1: IC5.39 JP3.18
BD2: IC5.40 JP3.17
BD3: IC5.41 JP3.16
BD4: IC5.43 JP3.15
BD5: IC5.44 JP3.14
BD6: IC5.45 JP3.13
BD7: IC5.46 JP3.12
BLINKER_L: BLINKER-L1.1 BLINKER-L2.1 R5.2 R6.2 R10.2
BLINKER_L_BACK_-: BLINKER-L2.2 BLINKER-L2.4 SV4.13
BLINKER_L_FRONT_-: BLINKER-L1.2 BLINKER-L1.4 SV4.11
BLINKER_R: BLINKER-R1.1 BLINKER-R2.1 R7.1 R14.2 R15.2
BLINKER_R_BACK_-: BLINKER-R2.2 BLINKER-R2.4 SV4.17
BLINKER_R_FRONT_-: BLINKER-R1.2 BLINKER-R1.4 SV4.15
BRAKE: BRAKE-C1.1 BRAKE-L1.1 BRAKE-R1.1 R1.2 R3.2 R9.2 R16.2
BRAKE_C_-: BRAKE-C1.2 BRAKE-C1.4 BRAKE-C2.2 BRAKE-C2.4 SV4.7
BRAKE_L_-: BRAKE-L1.2 BRAKE-L1.4 BRAKE-L2.2 BRAKE-L2.4 SV4.9
BRAKE_R_-: BRAKE-R1.2 BRAKE-R1.4 BRAKE-R2.2 BRAKE-R2.4 SV4.5
BRAKE_REGEN: BRAKE-C2.1 BRAKE-L2.1 BRAKE-R2.1 R2.2 R4.2 R8.1 R17.2
CONTACTOR_IN: CONTACTOR.2 K3.S@
CONTACTOR_OUT: CONTACTOR.1 K3.P@
CURRENT: R84.2 SV3.7
D5V+: C51.2 C52.2 C53.2 L5.2 R51.2 R52.2 U$2.P$27_
DC+: POWER.1 S1.2
DGND0: C51.1 C52.1 C53.1 IC10.1 IC10.3 IC10.4 IC10.7 JP11.4 JP11.10 JP11.18 JP13.2 JP13.4 JP13.6 R53.1 U$2.P$28_
DIR: IO.2 R26.2
DM: CONN1.D- IC5.7
DP: CONN1.D+ IC5.8
EECLK: IC5.62 IC7.2 JP3.21 R32.1
EECS: IC5.63 IC7.1 JP3.20 R34.1
EEDATA: IC5.61 IC7.3 JP3.22 R31.2
GND: BLINKER-L1.3 BLINKER-L2.3 BLINKER-R1.3 BLINKER-R2.3 BRAKE-C1.3 BRAKE-C2.3 BRAKE-L1.3 BRAKE-L2.3 BRAKE-R1.3 BRAKE-R2.3 R1.1 R2.1 R3.1 R4.1 R5.1 R6.1 R14.1 R15.1 R16.1 R17.1 SV4.19
GND0: C45.1 C46.1 C47.1 C48.1 C49.1 C50.1 C54.1 C55.1 C56.2 C57.2 POWER.2 R56.2 R57.2 U$2.P$11_ U$2.P$12_ U$2.P$30_ U$11.4 X3.3 X3.4 X3.5
GND1: 3V2.3 3V3.3 3V4.3 317CAP3.2 317CAP4.2 317CAP5.2 317CAP6.2 317CAP7.2 317CAP8.2 6103CAP5.2 6103CAP6.2 6103CAP7.2 6103CAP8.2 6103CAP9.2 6103CAP10.2 C1.2 C2.2 C3.2 C4.2 C5.2 C6.2 JP1.2 JP1.4 JP1.6 JP1.8 JP1.10 JP1.12 JP1.14 JP1.16 JP1.18 JP1.20 JP1.22 JP1.24 JP1.26 JP1.28 JP1.30 JP1.32 JP1.34 JP1.36 JP1.38 JP1.40 JP1.42 JP1.44 JP1.46 JP1.48 JP1.50 JP1.52 JP1.54 JP1.56 JP1.58 JP1.60 JP2.2 JP2.4 JP2.6 JP2.8 JP2.10 JP2.12 JP2.14 JP2.16 JP2.18 JP2.20 PWR_1.3 PWR_2.3 PWR_3.3 R12.2 R18.2 R20.2
GND4: R57.1 U$3.2
GND5: 3V.3 5V.3 317CAP1.2 317CAP2.2 6103CAP1.2 6103CAP2.2 7805CAP1.2 7805CAP2.2 ADC1.9 ADC2.9 ADC3.9 ADC4.9 ADC_CAP1.2 ADC_CAP2.2 ADC_CAP3.2 ADC_CAP4.2 R22.2 R23.2 SV1.33 SV2.2 SV2.3 U$1.4
GND6: K2.P2 POWER1.1 T1.2 T2.2
GND7: C7.2 C8.2 C9.- C10.2 C11.2 C12.2 C13.- C14.- C15.2 C16.2 C17.2 C18.2 C19.2 C20.2 C21.2 C22.2 C23.2 CONN1.GND IC5.1 IC5.5 IC5.10 IC5.11 IC5.13 IC5.15 IC5.25 IC5.35 IC5.47 IC5.51 IC6.1 IC7.5 JP3.2 JP4.4 R28.1 R29.1
GND8: 3V1.3 6103CAP3.2 6103CAP4.2 7805CAP3.2 7805CAP4.2 CURRENT_TRIM.1 IC12.12 IC13.3 IC14.12 OVER_CRIT.1 OVER_TRIM.1 OVER_WARN.1 POWER3.1 SV3.3 SV3.6 SV3.9 TEMP_TRIM.1 UNDER_CRIT.1 UNDER_TRIM.1 UNDER_WARN.1 UNDERVOLT_FET.3 VOLT.1
IN1: LMC6484_1.3 SV1.1 U$6.1
IN2: LMC6484_1.5 SV1.2 U$6.2
IN3: LMC6484_1.10 SV1.3 U$6.3
IN4: LMC6484_1.12 SV1.4 U$6.4
IN5: ADC1.5 SV1.5 U$6.5
IN6: ADC1.6 SV1.6 U$6.6
IN7: ADC1.7 SV1.7 U$6.7
IN8: ADC1.8 SV1.8 U$6.9
IN9: ADC2.1 SV1.9 U$6.10
IN10: ADC2.2 SV1.10 U$6.11
IN11: ADC2.3 SV1.11 U$6.12
IN12: ADC2.4 SV1.12 U$6.13
IN13: ADC2.5 SV1.13 U$6.14
IN14: ADC2.6 SV1.14 U$6.15
IN15: ADC2.7 SV1.15 U$7.1
IN16: ADC2.8 SV1.16 U$7.2
IN17: ADC3.1 SV1.17 U$7.3
IN18: ADC3.2 SV1.18 U$7.4
IN19: ADC3.3 SV1.19 U$7.5
IN20: ADC3.4 SV1.20 U$7.6
IN21: ADC3.5 SV1.21 U$7.7
IN22: ADC3.6 SV1.22 U$7.9
IN23: ADC3.7 SV1.23 U$7.10
IN24: ADC3.8 SV1.24 U$7.11
IN25: ADC4.1 SV1.25 U$7.12
IN26: ADC4.2 SV1.26 U$7.13
IN27: ADC4.3 SV1.27 U$7.14
IN28: ADC4.4 SV1.28 U$7.15
IN29: ADC4.5 SV1.29 U$8.1
IN30: ADC4.6 SV1.30 U$8.2
IN31: ADC4.7 SV1.31 U$8.3
IN32: ADC4.8 U$1.1 U$8.5
MOTOR+: D2.C OUTPUT.2
MOTOR+_PRE: D2.A K1.O2 K1.S1
MOTOR-: D1.C OUTPUT.1
MOTOR-_PRE: D1.A K1.O1 K1.S2
N$1: R8.2 SV4.2
N$2: R7.2 SV4.4
N$3: R9.1 SV4.1
N$4: R10.1 SV4.3
N$5: IC2.1 R11.2 R12.1
N$6: IC1.1 R13.2 R18.1
N$7: IC3.1 R19.2 R20.1
N$8: IC4.1 R21.2 R22.1
N$9: K1.P2 K2.S1
N$10: K1.P1 K2.S2
N$11: K1.1 R24.1
N$12: K2.1 R25.1
N$13: K1.2 T1.1
N$14: K2.2 T2.1
N$15: R27.1 T2.3
N$16: R26.1 T1.3
N$17: IC5.6 R29.2
N$18: C11.1 IC5.2 X1.1
N$19: C12.1 IC5.3 X1.2
N$20: PWR.C R28.2
N$21: R35.2 RX.C
N$22: R36.2 TX.C
N$23: C41.1 R40.2 U$2.P$1_
N$24: C41.2 R41.2 U$2.P$2_
N$25: C42.1 R42.2 U$2.P$3_
N$26: C42.2 R43.2 U$2.P$4_
N$27: C43.1 R44.2 U$2.P$5_
N$28: C43.2 R45.2 U$2.P$6_
N$29: C44.1 R46.2 U$2.P$7_
N$30: C44.2 R47.2 U$2.P$8_
N$31: JP7.1 R40.1 R48.2 U$11.1
N$32: R48.1 U$11.2
N$33: JP7.3 U$11.3
N$34: JP8.1 R41.1 R49.2 U$11.7
N$35: R49.1 U$11.6
N$36: JP8.3 U$11.5
N$37: JP14.2 R42.1
N$38: JP14.1 R43.1
N$39: JP15.4 R44.1
N$40: JP15.3 R45.1
N$41: JP15.2 R46.1
N$42: JP15.1 R47.1
N$43: C46.2 JP9.2 U$2.P$9_
N$44: JP9.1 U$2.P$32_
N$45: IC7.4 R31.1 R33.1
N$46: JP10.2 U$2.P$31_
N$47: C47.2 JP10.1 U$2.P$10_
N$48: C14.+ C16.1 IC5.4 L2.1
N$49: C13.+ C15.1 IC5.9 L1.1
N$50: JP11.1 U$2.P$21_
N$51: R50.1 U$2.P$22_
N$52: JP11.3 JP11.5 R50.2
N$53: JP11.7 JP11.9 JP12.1 U$2.P$20_
N$54: JP11.11 U$2.P$18_
N$55: JP11.13 U$2.P$25_
N$56: JP11.15 U$2.P$23_
N$57: JP12.2 U$2.P$19_
N$58: JP11.17 JP12.3
N$59: JP13.1 U$2.P$16_
N$60: JP13.3 R51.1 U$2.P$17_
N$61: JP13.5 R52.1 U$2.P$24_
N$62: IC10.5 JP11.20
N$63: IC10.6 JP11.16
N$64: C57.1 IC15.2 L5.1 L6.2 R54.1 R55.1
N$65: IC15.1 R55.2 R56.1
N$66: C56.1 IC15.3 S1.1
N$74: NEWBATT.P$2 OLDBATT.P$2 U$5.P$1
N$75: NEWBATT.P$1 OLDBATT.P$1 U$9.P$1
N$78: NEWBATT1.P$2 OLDBATT1.P$2 U$10.P$1
N$79: NEWBATT1.P$1 OLDBATT1.P$1 U$12.P$1
N$82: NEWBATT2.P$2 OLDBATT2.P$2 U$13.P$1
N$83: NEWBATT2.P$1 OLDBATT2.P$1 U$14.P$1
N$86: NEWBATT3.P$2 OLDBATT3.P$2 U$15.P$1
N$87: NEWBATT3.P$1 OLDBATT3.P$1 U$16.P$1
N$90: NEWBATT4.P$2 OLDBATT4.P$2 U$17.P$1
N$91: NEWBATT4.P$1 OLDBATT4.P$1 U$18.P$1
N$94: NEWBATT5.P$2 OLDBATT5.P$2 U$19.P$1
N$95: NEWBATT5.P$1 OLDBATT5.P$1 U$20.P$1
N$98: NEWBATT6.P$2 OLDBATT6.P$2 U$21.P$1
N$99: NEWBATT6.P$1 OLDBATT6.P$1 U$22.P$1
N$169: IC12.7 UNDER_WARN.2
N$170: IC12.5 UNDER_CRIT.2
N$171: IC12.9 IC12.11 TEMP_TRIM.2
N$172: R66.1 UNDER_CRIT.3
N$173: R67.1 UNDER_WARN.3
N$174: IC12.4 IC12.6 UNDER_TRIM.2
N$175: R71.1 UNDER_TRIM.3
N$176: R70.1 TEMP_TRIM.3
N$177: R72.1 UNDERVOLT.A
N$178: R73.1 UNDERVOLT_WARN.A
N$179: OVERTEMP1.A R74.1
N$180: OVERTEMP2.A R75.1
N$181: K3.1 R77.1
N$182: CURRENT_TRIM.2 IC14.9
N$183: OVER_WARN.3 R83.1
N$184: IC14.5 IC14.7 OVER_TRIM.2
N$185: OVER_TRIM.3 R86.1
N$186: CURRENT_TRIM.3 R85.1
N$187: OVERVOLT.A R87.1
N$188: OVERVOLT_WARN.A R88.1
N$189: OVERCURRENT.A R89.1
N$190: K3.2 OVERCURRENT_FET.2 OVERCURRENT_FET.4
N$191: OVERCURRENT_FET.3 OVERTEMP2_FET.2 OVERTEMP2_FET.4
N$192: OVERTEMP1_FET.2 OVERTEMP1_FET.4 OVERTEMP2_FET.3
N$193: OVERTEMP1_FET.3 OVERVOLT_FET.2 OVERVOLT_FET.4
N$194: OVERVOLT_FET.3 UNDERVOLT_FET.2 UNDERVOLT_FET.4
N$195: IC14.6 OVER_WARN.2
N$196: IC14.4 OVER_CRIT.2
N$197: OVER_CRIT.3 R82.1
N$198: IC14.8 R84.1
N$199: IC12.8 R68.1
N$200: IC12.10 R69.1
ON: IO.1 R27.2
OVERCURRENT_CRITICAL: IC14.14 OVERCURRENT.K OVERCURRENT_FET.1 R81.1
OVERTEMP_CRITICAL1: IC12.14 OVERTEMP1.K OVERTEMP1_FET.1 R79.1
OVERTEMP_CRITICAL2: IC12.13 OVERTEMP2.K OVERTEMP2_FET.1 R80.1
OVERVOLT_CRITICAL: IC14.2 OVERVOLT.K OVERVOLT_FET.1 R78.1
OVERVOLT_WARNING1: IC14.1 OVERVOLT_WARN.K
SIGNALGND: JP8.2 JP14.3 R39.2 X3.2
SIGNALV+: JP7.2 JP14.4 R39.1 X3.1
SPI_CLK: ADC1.13 ADC2.13 ADC3.13 ADC4.13 SV2.10
SPI_CS1: ADC1.10 SV2.7
SPI_CS2: ADC2.10 SV2.6
SPI_CS3: ADC3.10 SV2.5
SPI_CS4: ADC4.10 SV2.4
SPI_DIN: ADC1.11 ADC2.11 ADC3.11 ADC4.11 SV2.8
SPI_DOUT: ADC1.12 ADC2.12 ADC3.12 ADC4.12 SV2.9
TEMP1: R68.2 SV3.1
TEMP2: R69.2 SV3.4
UNDERVOLT_CRITICAL: IC12.2 R76.1 UNDERVOLT.K UNDERVOLT_FET.1
UNDERVOLT_WARNING: IC12.1 UNDERVOLT_WARN.K
VREF: 3V.2 6103CAP2.1 ADC1.15 ADC2.15 ADC3.15 ADC4.15 SV1.34
VREF1: 3V1.2 6103CAP4.1 R70.2 R71.2 R85.2 R86.2
VREF2: 3V2.2 6103CAP6.1 JP1.1 JP1.3 JP1.5 JP1.7 JP1.9 JP1.11 JP1.13 JP1.15 JP1.17 JP1.19
VREF3: 3V3.2 6103CAP8.1 JP1.21 JP1.23 JP1.25 JP1.27 JP1.29 JP1.31 JP1.33 JP1.35 JP1.37 JP1.39
VREF4: 3V4.2 6103CAP10.1 JP1.41 JP1.43 JP1.45 JP1.47 JP1.49 JP1.51 JP1.53 JP1.55 JP1.57 JP1.59

## Tracks (layer width: path | path; a pad name or v marks a point on that pad's centre or on a via)
1.8V  (via drill 0.38)
  Top 0.254: C19.1 188.98,30.1 190.75,31.88 190.75,32.69 | 198.09,32.64 IC5.12 198.09,27.14 C17.1 | 198.09,32.64 198.09,38.45 v198.12,38.73 | v198.12,40.51 198.09,40.54 IC5.37 198.09,44.17 200.15,46.23 C18.1 | v192.79,40.51 192.47,40.2 IC5.49 187.87,40.2 C9.+ | 190.75,32.69 198.04,32.69 198.09,32.64 | 190.75,32.69 IC5.64
  Top 0.305: C17.1 199.33,26.73 200.03,26.04 200.03,23.75 200.79,22.99 203.33,22.99 v207.65,18.67
  Bottom 0.254: v198.12,38.73 v198.12,40.51 v192.79,40.51
  Bottom 0.305: v207.65,18.67 210.19,16.13 210.19,9.27 JP4.3
3.3V  (via drill 0.38)
  Top 0.254: ADC_CAP1.1 105.66,46.23 105.66,42.88 106.93,41.6 ADC1.16 106.98,41.48 106.98,40.23 109.17,38.05 120.24,38.05 | U$6.16 124.08,31.34 120.24,35.18 120.24,38.05 | 120.24,38.05 120.24,40.87 120.85,41.48 ADC2.16 120.9,42.19 121.74,43.03 122.15,43.03 ADC_CAP2.1 125.48,46.28 v127.53,48.34 | U$7.16 138.05,27.51 138.86,26.7 150.6,26.7 152.02,28.12 U$8.8 151.97,28.25 151.97,30.38 148.16,34.19 148.16,39.9 148.79,40.54 148.79,41.48 ADC4.16 148.84,42.39 150.34,43.89 ADC_CAP4.1 150.24,46.3 140.59,46.3 139.7,47.19 | 142.37,57.99 317CAP2.1 | 142.37,57.99 143.76,56.59 IC4.4 | 139.93,55.58 138.43,55.58 R21.1 | 139.93,55.58 142.26,57.91 142.37,57.99 | ADC3.16 134.87,42.57 137.39,45.09 ADC_CAP3.1 137.49,46.81 138.2,47.52 139.37,47.52 139.7,47.19 | v140,52.86 140,55.47 139.93,55.58 | 139.7,47.19 v140,47.5
  Bottom 0.254: v140,47.5 140,48.34 | 140,48.34 v140,52.86 | 140,48.34 v127.53,48.34
3.3V1
  Top 0.254: 91.82,24.77 86.74,29.84 317CAP8.1 | 91.82,24.77 95.25,28.19 96.9,28.19 R19.1 | 91.82,24.77 IC3.4 91.69,24.77 91.69,17.02 77.98,3.3 38.35,3.3 37.34,4.32 37.34,5.84 JP2.19
3.3V2  (via drill 0.61)
  Top 0.254: 14.35,32.51 10.79,36.07 9.27,36.07 IC2.4 9.27,36.2 5.84,32.77 4.19,32.77 R11.1 | 14.35,32.51 v15.88,32.51 | 14.35,32.51 317CAP4.1
  Bottom 0.254: JP2.15 37.08,14.73 30.35,14.73 28.83,16.26 28.83,19.56 v15.88,32.51
3.3V3  (via drill 0.38, 0.51)
  Top 0.254: C22.1 196.34,47.12 195.59,46.37 IC5.42 195.59,39.71 195.58,39.7 | 199.64,39.7 IC5.31 203.78,39.7 204.47,40.39 C21.1 | 195.58,39.7 199.64,39.7 | 195.58,39.7 IC5.50 189.56,39.7 188.85,38.99 188.85,36.7 | 199.64,39.7 199.64,35.18 200.62,34.2 IC5.20 204.81,34.2 205.55,33.46 C20.1 | 188.85,36.7 IC5.56 | 188.85,36.7 C23.1
  Top 0.305: C10.1 184.34,51.82 IC7.8 188.98,51.82 189.1,51.94 | C22.1 190.31,48.2 189.1,49.4 189.1,51.94 | R34.2 R33.2 198.5,56.77 198.25,57.02 189.87,57.02 189.1,56.26 189.1,54.48 | R34.2 R32.2 | 189.1,51.94 189.1,54.48 | IC7.6 188.98,54.36 189.1,54.48 | R34.2 206.35,55.81 TX.A RX.A | R30.1 203.27,24.96 v203.33,25.02
  Top 0.406: 205.87,12.57 IC6.2 205.87,8.26 208.79,5.33 JP4.2 | 205.87,12.57 205.87,15.88 v206.63,16.64 204.69,18.58 L1.2 | C8.1 205.93,12.64 205.87,12.57 | C23.1 187.13,35.49 183.51,31.88 183.51,13.34 | 183.51,2.79 185.26,2.79 PWR.A 188.94,2.76 v189.1,2.92 | 183.51,2.79 JP3.1 | 183.51,2.79 183.51,13.34 | L2.2 183.6,13.25 183.51,13.34 | C20.1 205.55,29.14 v206.63,28.07
  Bottom 0.305: 206.63,25.02 v203.33,25.02
  Bottom 0.406: v206.63,16.64 206.63,25.02 v206.63,28.07 | v189.1,2.92 209.17,2.92 JP4.2
3.3V4  (via drill 0.61)
  Top 0.254: 75.31,45.09 80.39,40.01 317CAP6.1 | 75.31,45.09 71.88,41.66 70.23,41.66 R13.1 70.23,41.53 69.47,41.53 v58.8,30.86 | 75.31,45.09 IC1.4 | v49.4,15.37 JP2.17
  Bottom 0.254: v49.4,15.37 49.4,21.46 v58.8,30.86
3.3V+  (via drill 0.61)
  Top 0.254: 229.95,94.69 229.95,97.16 | 229.95,97.16 229.95,98.42 R53.2 | 229.95,94.69 229.74,94.69 IC10.2 | IC10.8 230.38,90.12 230.38,94.61 230.05,94.61 229.95,94.69 | 209.59,111.77 201.88,104.06 201.88,98.7 203.25,98.7 204.8,97.16 R54.2 | 209.59,111.77 214.17,116.36 U$3.1 | v230.07,101.58 229.69,101.19 220.17,101.19 209.59,111.77 | v230.05,97.16 229.95,97.16
  Bottom 0.254: v230.05,97.16 230.07,97.18 v230.07,101.58
5V
  Top 0.254: 3V2.1 75.56,28.19 75.31,28.45 72.77,28.45 6103CAP5.1 72.77,28.57 59.82,28.57 55.75,32.64 36.45,32.64 30.67,38.42 | 30.67,38.42 26.8,34.54 PWR_1.2 | 30.67,38.42 30.86,38.61 C2.1
5V1  (via drill 0.61)
  Top 0.254: C6.1 63.88,38.61 59.82,34.54 PWR_3.2 59.69,34.54 v59.69,33.02 | v54.48,15.37 JP2.13
  Bottom 0.254: v54.48,15.37 54.48,25.27 59.69,30.48 v59.69,33.02
5V2  (via drill 0.38)
  Top 0.254: v115.88,25.07 116.43,24.51 6484CAP1.1 | v110.92,24.89 112.01,23.8 LMC6484_1.4 | 128.5,57.53 128.5,56.13 128.07,55.7 3V.1 | 128.5,57.53 128.5,58.55 6103CAP1.1 | 113.41,52.45 114.1,52.45 114.33,52.22 5V.2 | 113.41,52.45 7805CAP2.1 109.93,52.35 v108.58,51 | 128.5,57.53 118.39,57.53 113.41,52.55 113.41,52.45
  Bottom 0.254: 108.51,32.44 v115.88,25.07 | 108.51,32.44 107.9,32.44 107.47,32 107.47,28.35 v110.92,24.89 | v108.58,51 108.58,32.54 108.51,32.44
5V3
  Top 0.254: SV3.5 SV3.8 71.4,66.09 69.83,67.67 | SV3.2 64.19,66.04 65.81,67.67 69.83,67.67 | 37.47,122.53 38.38,122.53 38.79,122.12 3V1.1 | 37.47,122.53 6103CAP3.1 | 37.47,122.53 37.47,124.41 38.89,125.83 54.18,125.83 58.29,121.72 60.12,121.72 62.26,119.58 IC13.2 62.36,119.63 65.25,122.53 7805CAP3.1 67.79,122.48 68.15,122.48 71.3,119.33 71.3,104.19 70.94,103.83 70.94,95.96 71.14,95.76 71.14,89.92 71.3,89.76 71.3,78.79 69.88,77.37 69.88,67.77 69.83,67.67
5V4  (via drill 0.61)
  Top 0.254: 6103CAP7.1 48.64,28.45 51.18,28.45 51.44,28.19 3V3.1 51.56,28.07 v51.56,20.19
  Bottom 0.254: v51.56,20.19 51.56,19.68 51.69,19.56 51.69,7.75 JP2.9
5V5  (via drill 0.61)
  Top 0.254: 6103CAP9.1 23.24,28.45 v24.77,28.45 25.78,28.45 26.04,28.19 3V4.1 | C4.1 47.37,38.61 43.31,34.54 PWR_2.2 43.18,34.67 v42.04,33.53
  Bottom 0.254: v24.77,28.45 36.96,28.45 37.02,28.51 | v42.04,33.53 37.02,28.51 | JP2.11 49.28,8.51 41.53,16.26 41.53,24 37.02,28.51
5V6  (via drill 0.38, 0.51)
  Top 0.305: v203.58,6.99 203.57,7
  Top 0.406: C7.1 204.34,11.68 203.57,10.91 IC6.3 203.57,7 | CONN1.VUSB 194.74,7.7 v195.71,6.73 | v203.58,6.99 206.12,6.99 210.31,2.79 JP4.1
  Bottom 0.406: v195.71,6.73 197.23,5.21 201.8,5.21 v203.58,6.99
5V+  (via drill 0.61)
  Top 0.254: 235.79,106.02 235.79,107.16 236.07,107.16 236.27,107.37 236.27,107.92 U$2.P$29_ | 235.79,106.02 235.79,103 U$2.P$13_ 235.76,102.87 235.76,102.41 234.9,101.55 233.88,101.55 233.07,100.74 224.33,100.74 v219.53,95.94 | v235.89,106.02 235.79,106.02 | v239.29,101.73 v246.15,101.73
  Bottom 0.254: L6.1 216.15,88.27 216.26,88.37 216.26,91.69 C54.2 216.64,92.18 C55.2 216.76,95.94 v219.53,95.94 | C45.2 246.89,110.11 248.08,110.11 248.08,109.96 249.86,108.18 249.86,107.95 U$11.8 249.83,107.82 249.71,107.7 249.71,105.79 246.15,102.23 v246.15,101.73 | C49.2 C50.2 238.1,112.55 238.86,112.55 238.86,111.89 239.95,110.8 239.95,108.48 237.58,106.11 | C48.2 232.92,110.11 234.11,108.92 234.11,108.74 235.89,106.96 v235.89,106.02 235.99,105.94 237.41,105.94 237.58,106.11 | v239.29,101.73 239.52,101.96 239.52,104.17 237.58,106.11
12V  (via drill 0.38)
  Top 0.254: 7805CAP1.1 113.84,56.26 114.33,56.74 5V.1 114.45,56.79 116.71,56.79 120.7,60.78 146.07,60.78 146.33,60.53 317CAP1.1 146.43,60.45 147.45,60.45 | 147.45,60.45 155.27,60.45 158.37,57.35 U$1.8 158.42,57.23 158.42,56.67 159.18,55.91 164.47,55.91 174.07,46.3 174.07,37.77 172.97,36.68 SV2.1 | v146.07,52.3 IC4.3 | 147.45,60.45 v147.45,59.82
  Bottom 0.254: v146.07,52.3 146.07,58.45 v147.45,59.82
12V1
  Top 0.254: R24.2 164.68,112.27 164.68,100.2 POWER1.2 | 163.03,98.93 163.03,90.3 166.21,90.3 169.63,93.73 169.63,110.87 171.03,112.27 R25.2
  Top 2.794: POWER1.2 163.03,98.93 150.08,98.93 150.08,111 137.05,111 K2.P1
12V2  (via drill 0.38)
  Top 0.254: IC12.3 62.66,88.9 63.78,90.02 63.78,105.56 62.66,106.68 IC14.3 61.29,106.73 60.07,106.73 58.7,108.1 58.7,111.86 53.34,117.22 | v54.63,122.53 7805CAP4.1 | IC13.1 57.78,119.69 57.48,119.69 v56.67,120.5 56.57,120.45 53.34,117.22 | 35.13,114.3 R77.2 43.26,114.25 45.03,116.03 52.15,116.03 53.34,117.22 | 35.13,114.3 33.86,115.57 R76.2 | R73.2 12.22,118.11 12.22,111.86 R88.2 12.22,111.76 12.22,105.51 R72.2 12.22,105.41 12.22,99.16 R87.2 12.22,99.06 12.22,92.81 R74.2 12.22,92.71 12.22,86.46 R75.2 12.22,86.36 12.22,80.01 R89.2 12.32,79.91 21.26,79.91 22.89,78.28 31.42,78.28 33.71,80.57 R81.2 | R81.2 33.81,80.01 33.81,88.9 R80.2 33.81,89 33.81,97.79 R79.2 33.81,97.89 33.81,106.68 R78.2 33.86,106.78 33.86,110.85 35.08,112.06 35.08,114.2 35.13,114.3 | POWER3.2 37.21,76.5 33.81,79.91 R81.2
  Bottom 0.254: v56.67,120.5 v54.63,122.53
12V3
  Top 0.254: SV4.20 SV4.18 SV4.16 SV4.14 SV4.12 SV4.10 SV4.8 SV4.6
12V4  (via drill 0.61)
  Top 0.254: 317CAP7.1 92.46,34.29 92.46,33.91 v91.44,32.89 89.53,30.99 IC3.3 | 317CAP5.1 74.68,35.56 74.68,35.94 v75.69,36.96 77.6,38.86 IC1.3 | 317CAP3.1 8.64,26.67 8.64,27.05 v9.65,28.07 11.56,29.97 IC2.3 | v19.43,41.15 C1.1 | v35.94,41.15 C3.1 | v52.45,41.15 C5.1 | v23.5,34.67 22.35,34.67 PWR_1.1 | v40.01,34.67 38.86,34.67 PWR_2.1 | v56.52,34.67 55.37,34.67 PWR_3.1
  pour Bottom: 1.65,1.27 99.44,1.27 99.44,50.8 1.65,50.8
96V  (via drill 0.38)
  Top 0.254: 86.33,80.01 R83.2 86.23,80.62 | 86.33,92.71 R67.2 86.33,92.81 | 86.33,105.41 R82.2 86.33,105.51 | 86.33,118.11 R66.2
  Top 0.61: 86.33,92.71 86.33,80.01 | 86.33,92.81 86.33,105.41 | 86.33,105.51 86.33,118.11 | v71.7,76.1 81.71,76.1 86.23,80.62
  Bottom 0.254: 21.97,70.46 VOLT.2
  Bottom 0.61: 21.97,70.46 27,70.46 36.09,61.37 56.97,61.37 v71.7,76.1
!PWEREN  (via drill 0.38)
  Top 0.254: IC5.60 189.89,34.7 189.61,34.42 v189.61,32.13
  Bottom 0.254: v189.61,32.13 187.07,29.59 187.07,13.08 JP3.3
!RESET
  Top 0.254: JP4.5 208.91,15.62 208.91,20.95 203.01,26.86 R30.2 201.68,28.7 201.04,29.34 199.77,29.34 199.09,30.02 IC5.14
!SUSPEND  (via drill 0.38)
  Top 0.254: IC5.36 198.59,43.91 v204.34,49.66
  Bottom 0.254: v204.34,49.66 205.1,49.66 JP4.22
A1
  Top 0.254: LMC6484_1.2 LMC6484_1.1 108.13,23.29 106.93,24.49 ADC1.1
A2  (via drill 0.38)
  Top 0.254: LMC6484_1.7 LMC6484_1.6 114.83,23.29 v114.83,25.07 | v108.2,31.7 ADC1.2
  Bottom 0.254: v114.83,25.07 v108.2,31.7
A3  (via drill 0.38)
  Top 0.254: 115.04,28.4 115.82,28.4 LMC6484_1.8 | 115.04,28.4 114.55,28.4 LMC6484_1.9 | v109.47,34.06 ADC1.3 | v113.44,30.1 115.04,28.5 115.04,28.4
  Bottom 0.254: v113.44,30.1 v109.47,34.06
A4
  Top 0.254: 108.99,28.4 109.47,28.4 LMC6484_1.13 | 108.99,28.4 108.2,28.4 LMC6484_1.14 | ADC1.4 110.74,30.25 108.99,28.5 108.99,28.4
AC0
  Top 0.254: IC5.26 208.93,37.2 210.31,35.81 JP4.14
AC1
  Top 0.254: IC5.27 209.15,37.7 209.8,38.35 JP4.15
AC2
  Top 0.254: IC5.28 208.89,38.2 JP4.16
AC3
  Top 0.254: IC5.29 208.62,38.7 209.93,40.01 209.93,41.78 JP4.17 212.98,44.83 212.98,46.61 212.34,47.24 210.95,47.24 209.99,48.2 R35.1
AC4
  Top 0.254: R36.1 206.38,46.86 207.26,45.97 209.42,45.97 | 209.42,45.97 JP4.18 | 209.42,45.97 209.42,40.26 208.36,39.2 IC5.30
AC5  (via drill 0.38)
  Top 0.254: IC5.32 203.01,40.2 v205.1,42.29
  Bottom 0.254: v205.1,42.29 205.36,42.29 JP4.19
AC6  (via drill 0.38)
  Top 0.254: IC5.33 202.58,42.05 v204.34,43.81
  Bottom 0.254: JP4.20 v204.34,43.81
AC7  (via drill 0.38)
  Top 0.254: IC5.34 199.59,42.87 v204.34,47.62
  Bottom 0.254: v204.34,47.62 205.61,47.62 JP4.21
AD0
  Top 0.254: IC5.16 201.31,30.85 202.82,29.34 202.82,27.81 209.42,21.21 209.42,17.65 JP4.6
AD1
  Top 0.254: IC5.17 203.01,32.7 203.33,32.38 203.33,28.07 209.93,21.46 209.93,19.68 JP4.7
AD2
  Top 0.254: IC5.18 203.28,33.2 203.84,32.64 203.84,28.32 JP4.8
AD3
  Top 0.254: IC5.19 203.54,33.7 204.34,32.89 204.34,28.57 209.8,23.11 JP4.9
AD4
  Top 0.254: IC5.21 206.85,34.7 209.17,32.38 209.17,28.07 JP4.10
AD5
  Top 0.254: IC5.22 207.12,35.2 209.68,32.64 209.68,30.1 JP4.11
AD6
  Top 0.254: IC5.23 207.38,35.7 210.19,32.89 210.19,32.13 JP4.12
AD7
  Top 0.254: IC5.24 207.64,36.2 210.57,33.27 JP4.13
AGND  (via drill 0.38)
  Top 0.254: R23.1 157.78,24.89 U$8.4 155.88,22.81 155.88,22.05 157.66,20.27 157.66,11.02 SV1.32 156.64,9.83 154.74,9.83 154.1,10.46 154.1,11.02 146.94,18.19 U$7.8 146.89,23.04 146.89,23.6 145.11,25.38 137.08,25.38 v134.39,22.68 | v109.47,38.79 ADC1.14 | v111.96,32.61 111.96,28.5 LMC6484_1.11 112.01,27.76 113.97,25.81 6484CAP1.2 119.05,25.68 130.84,25.68 132.97,23.55 U$6.8 132.92,22.81 v132.92,21.21 | ADC2.14 123.44,40.95 v122.38,39.88 | v130.43,39.98 136.42,39.98 137.41,40.97 ADC3.14 137.47,41.71 137.47,43.61 137.9,44.04 138.51,44.04 v139.32,43.23 | ADC4.14 151.38,42.57 v150.72,43.23
  Bottom 0.254: v111.96,32.61 109.47,35.1 v109.47,38.79 109.58,38.86 110.59,39.88 v122.38,39.88 122.48,39.8 123.14,39.14 123.75,39.14 124.59,39.98 v130.43,39.98 | v139.32,43.23 v150.72,43.23 | v132.92,21.21 v134.39,22.68
  other vias: 123.44,17.91 122.17,13.08 115.19,16.64 119.63,33.78 132.97,36.96
  pour Top: 103.12,39.5 164.72,39.5 164.72,1.4 103.12,1.4
  pour Bottom: 103.12,39.5 164.72,39.5 164.72,1.4 103.12,1.4
BC0  (via drill 0.38)
  Top 0.254: IC5.48 191.66,42.05 v191.64,42.04
  Bottom 0.254: v191.64,42.04 183.01,33.4 183.01,30.1 JP3.11
BC1  (via drill 0.38)
  Top 0.254: IC5.52 194.22,38.7 v194.69,38.23
  Bottom 0.254: v194.69,38.23 188.59,38.23 183.51,33.15 183.51,28.07 JP3.10
BC2  (via drill 0.38)
  Top 0.254: IC5.53 192.94,38.2 v193.93,37.21
  Bottom 0.254: v193.93,37.21 188.34,37.21 184.02,32.89 184.02,26.04 JP3.9
BC3  (via drill 0.38)
  Top 0.254: IC5.54 192.17,37.7 192.91,36.96 v192.91,36.2
  Bottom 0.254: v192.91,36.2 188.09,36.2 184.53,32.64 184.53,24 JP3.8
BC4  (via drill 0.38)
  Top 0.254: IC5.55 191.66,37.2 191.9,36.96 v191.9,35.18
  Bottom 0.254: v191.9,35.18 187.83,35.18 185.04,32.38 185.04,21.97 JP3.7
BC5  (via drill 0.38)
  Top 0.254: IC5.57 189.11,36.2 186.06,33.15 v186.06,32.13
  Bottom 0.254: JP3.6 185.55,19.94 185.55,31.62 v186.06,32.13
BC6  (via drill 0.38)
  Top 0.254: IC5.58 189.37,35.7 187.58,33.91 v187.58,33.4
  Bottom 0.254: v187.58,33.4 187.58,32.38 186.06,30.86 186.06,17.91 JP3.5
BC7  (via drill 0.38)
  Top 0.254: IC5.59 189.63,35.2 188.59,34.16 v188.59,32.77
  Bottom 0.254: v188.59,32.77 188.59,32.64 186.56,30.61 186.56,15.11 JP3.4
BD0  (via drill 0.38)
  Top 0.254: IC5.38 197.59,44.43 199.01,45.85 199.01,48.13 v198.25,48.9
  Bottom 0.254: v198.25,48.9 197.23,49.91 191.39,49.91 189.99,48.51 JP3.19
BD1  (via drill 0.38)
  Top 0.254: IC5.39 197.09,44.69 198.5,46.1 198.5,47.12 v197.99,47.62
  Bottom 0.254: v197.99,47.62 196.22,49.4 191.64,49.4 188.21,45.97 JP3.18
BD2  (via drill 0.38)
  Top 0.254: IC5.40 196.59,44.95 197.49,45.85 v197.49,46.61
  Bottom 0.254: v197.49,46.61 195.2,48.9 191.9,48.9 186.44,43.43 JP3.17
BD3  (via drill 0.38)
  Top 0.254: IC5.41 196.09,45.72 v196.47,46.1
  Bottom 0.254: v196.47,46.1 196.47,46.86 194.94,48.39 192.15,48.39 184.66,40.89 JP3.16
BD4  (via drill 0.38)
  Top 0.254: IC5.43 195.09,46.97 v194.69,47.37
  Bottom 0.254: v194.69,47.37 191.9,47.37 182.88,38.35 JP3.15
BD5  (via drill 0.38)
  Top 0.254: IC5.44 194.59,45.95 v194.18,46.35
  Bottom 0.254: v194.18,46.35 191.64,46.35 JP3.14
BD6  (via drill 0.38)
  Top 0.254: IC5.45 194.09,44.92 v193.68,45.34
  Bottom 0.254: v193.68,45.34 192.15,45.34 190.12,43.31 190.12,42.04 181.48,33.4 181.1,33.4 JP3.13
BD7  (via drill 0.38)
  Top 0.254: IC5.46 193.59,43.64 v192.91,44.32
  Bottom 0.254: v192.91,44.32 191.9,44.32 190.63,43.05 190.63,41.78 182.5,33.66 182.5,32.13 JP3.12
BLINKER_L  (via drill 0.38, 0.61)
  Top 0.254: 234.19,25.65 236.09,25.65 R6.2 | 234.19,25.65 232.28,25.65 R5.2 | v248.92,25.78 251.33,25.78 R10.2 | v247.65,27.05 247.01,27.69 234.31,27.69 | 224.16,27.69 234.31,27.69 | 224.16,27.69 221.11,30.73 BLINKER-L2.1 221.11,30.86 | v234.19,26.29 234.19,25.65 | 234.31,27.69 v234.31,28.07 | 221.11,40.89 BLINKER-L1.1 | 224.16,27.69 224.16,27.81 v223.39,28.57
  Top 0.406: 221.11,40.89 221.11,37.72 v220.85,37.72
  Bottom 0.254: v247.65,27.05 v248.92,25.78 | v234.19,26.29 234.31,26.42 v234.31,28.07
  Bottom 0.406: v220.85,37.72 220.85,29.27 222.69,29.27 v223.39,28.57
BLINKER_L_BACK_-  (via drill 0.61)
  Top 0.254: BLINKER-L2.4 BLINKER-L2.2 223.39,30.73 v225.55,28.57 | SV4.13 245.11,9.91 230.5,9.91 229.87,10.54 v229.87,23.5
  Bottom 0.254: v229.87,23.5 225.55,27.81 v225.55,28.57
  pour Top: 227.2,37.72 227.2,2.16 215.77,2.16 215.77,37.72
BLINKER_L_FRONT_-  (via drill 0.38)
  Top 0.254: BLINKER-L1.4 223.39,42.42 | 223.39,42.42 BLINKER-L1.2 | 223.39,42.42 v218.69,42.42
  Bottom 0.254: SV4.11 244.86,12.19 246.76,12.19 247.4,11.56 247.4,9.4 230.25,9.4 218.69,20.95 v218.69,42.42
  pour Top: 227.2,38.99 227.2,61.85 215.77,61.85 215.77,38.99
BLINKER_R  (via drill 0.61)
  Top 0.254: BLINKER-R1.1 256.67,40.89 256.67,30.86 BLINKER-R2.1 256.67,30.73 v256.67,28.07 | 256.67,25.65 258.95,25.65 R15.2 | 256.67,25.65 255.14,25.65 | 255.14,25.65 251.97,22.48 241.68,22.48 239.9,24.26 R7.1 | 255.14,25.65 R14.2 | 256.67,25.65 v256.67,25.78
  Bottom 0.254: v256.67,25.78 v256.67,28.07
BLINKER_R_BACK_-
  Top 0.254: BLINKER-R2.4 BLINKER-R2.2 258.95,30.73 260.35,29.34 267.46,29.34 267.46,23.88 256.03,12.45 252.73,12.45 SV4.17
  pour Top: 255.14,2.16 255.14,37.72 267.84,37.72 267.84,2.16
BLINKER_R_FRONT_-  (via drill 0.61)